# EAGLE board TREM_STM_OLD (EAGLE 9.2.2)
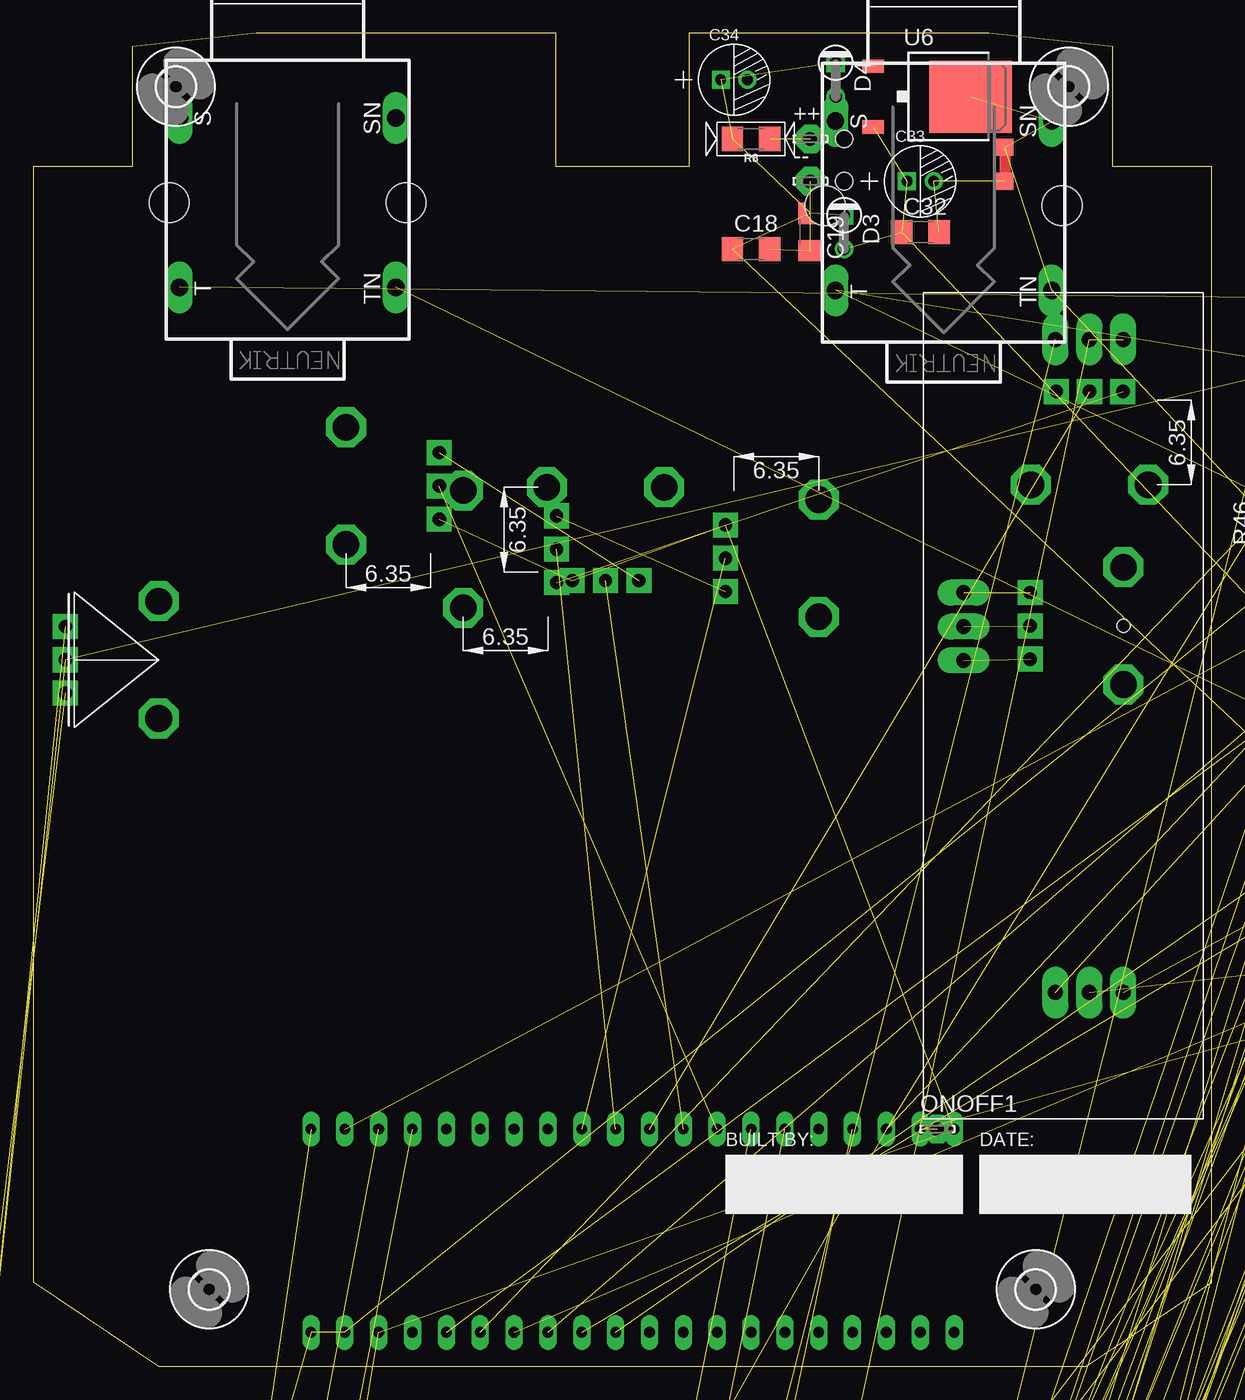
[diagram p0: board, top side]
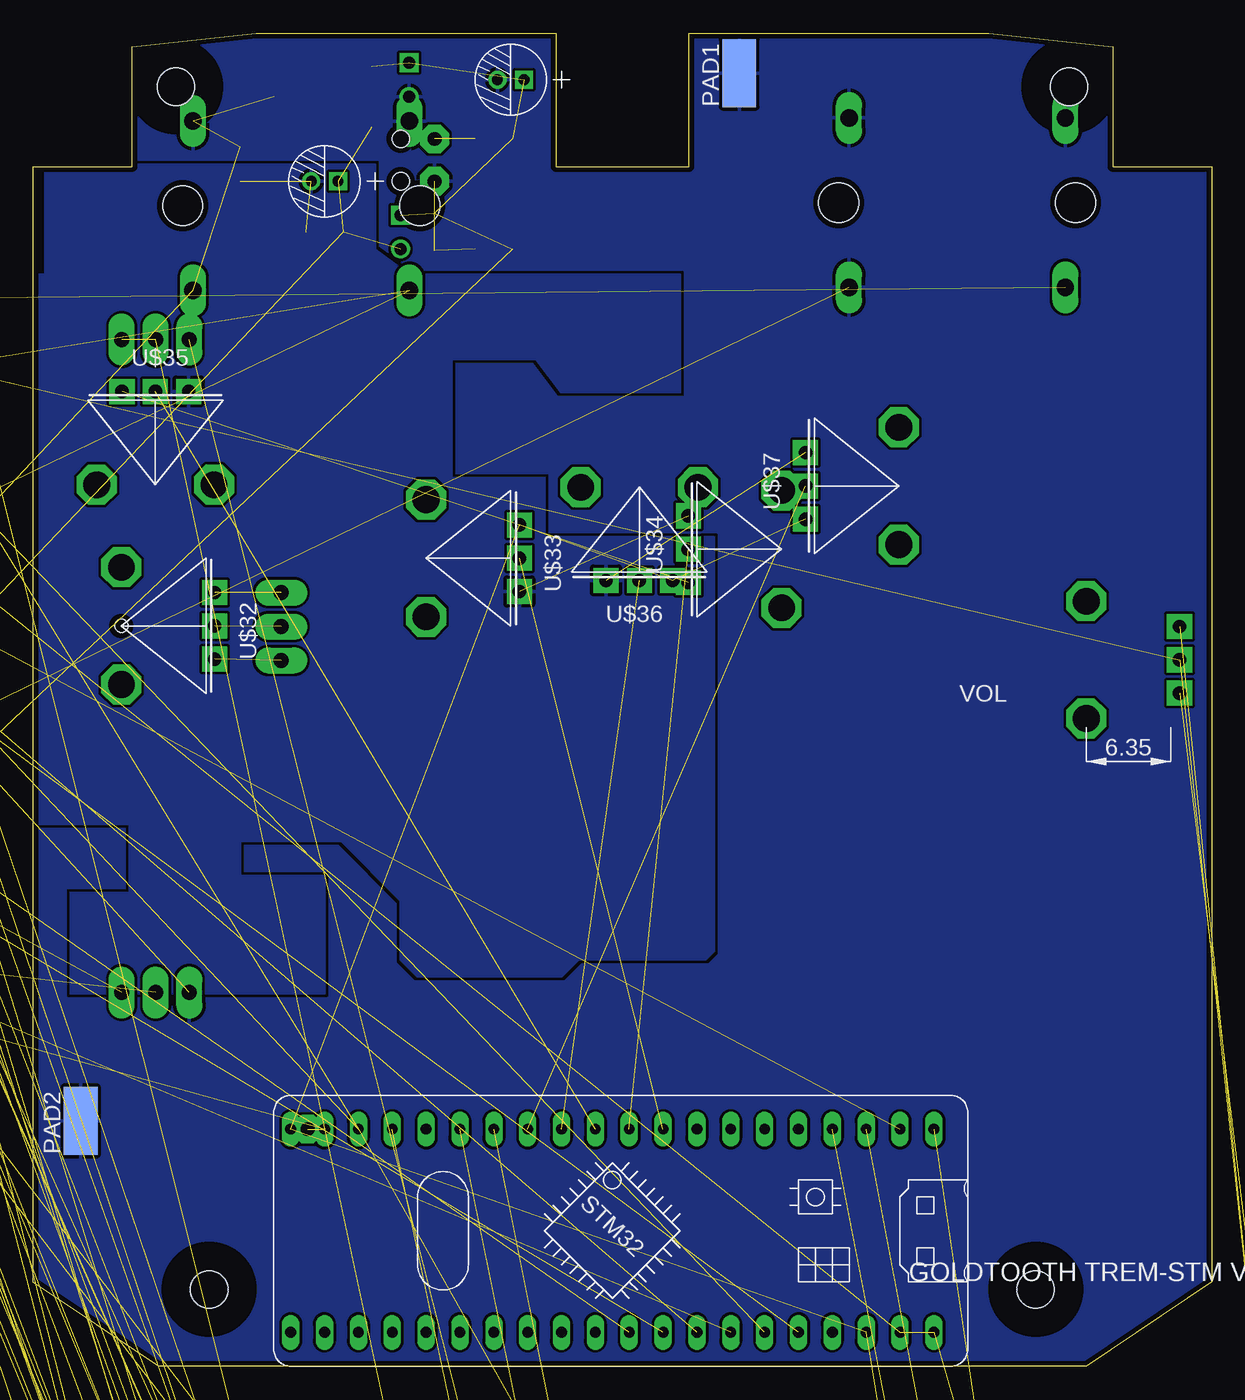
[diagram p1: board, bottom side, seen from below]

Size 88.4 x 100 mm. Coordinates in mm from the lower left corner, seen from the top.
Outline: 0,6.35 9.4,0 79,0 88.4,6.3 88.4,90 81,90 81,99 71.7,100 49.2,100 49.2,90 39.2,90 39.2,100 16.7,100 7.4,99 7.4,90 0,90 0,6.35
Copper layers (1*16): Top 0.035mm / dielectric 1.5mm / Bottom 0.035mm
Design rules "GT": minimum track width 8mil, minimum drill 0.3mm, track to track 8mil, track to pad 6mil, pad to pad 6mil, via to via 6mil, smd to smd 0mil, copper to edge 0.4mm, drill to drill 10mil, minimum pad ring 10mil, minimum via ring 6mil, stop-mask expansion 2mil, vias tented up to drill 25mil, thermal gap 10mil
bRestrict: 1 lines

## Footprints (pad centres in the part's own frame; a part is rotated, then mirrored left to right if it is on the bottom)
LSP10 = drill 1.016 pad 2.159 octagon: MP 0,0
PC-D5.3MM = drill 0.8 pad 1.35 square: + -1,0 | drill 0.8 pad 1.35: - 1,0
C1206 = smd 1.6 x 1.8: 1 -1.4,0; 2 1.4,0
CERAMIC-5MM = drill 0.635 pad 1.143: 1 -2.5,0; 2 2.5,0
DO41-1 = drill 0.9: A 1.27,0 | drill 0.9 square: C -1.27,0
SMB = smd 2.4 x 2.4: A 2.2,0; C -2.2,0
DIODE-1N4148 = drill 0.9 pad 1.88: A -3.81,0; C 3.81,0
SO-16 = smd 0.66 x 2.032: 1 -4.445,-3.073; 2 -3.175,-3.073; 3 -1.905,-3.073; 4 -0.635,-3.073; 5 0.635,-3.073; 6 1.905,-3.073; 7 3.175,-3.073; 8 4.445,-3.073; 9 4.445,3.073; 10 3.175,3.073; 11 1.905,3.073; 12 0.635,3.073; 13 -0.635,3.073; 14 -1.905,3.073; 15 -3.175,3.073; 16 -4.445,3.073
2,8 = hole 2.8: 0,0
SO08 = smd 0.6 x 2.2: 1 -1.905,-2.6; 2 -0.635,-2.6; 3 0.635,-2.6; 4 1.905,-2.6; 5 1.905,2.6; 6 0.635,2.6; 7 -0.635,2.6; 8 -1.905,2.6
SO14 = smd 0.6 x 2.2: 1 -3.81,-2.6; 2 -2.54,-2.6; 3 -1.27,-2.6; 4 0,-2.6; 5 1.27,-2.6; 6 2.54,-2.6; 7 3.81,-2.6; 8 3.81,2.6; 9 2.54,2.6; 10 1.27,2.6; 11 0,2.6; 12 -1.27,2.6; 13 -2.54,2.6; 14 -3.81,2.6
MONO = drill 1.3 long: S 6.35,8.115; SN 6.35,-8.115; T -6.35,8.115; TN -6.35,-8.115 | hole 3: 0,8.89; 0,-8.89
FTR-B4G = smd 0.8 x 3.1: 1 -3.8,-2.65; 2 -0.6,-2.65; 3 1.6,-2.65; 4 3.8,-2.65; 5 3.8,2.65; 6 1.6,2.65; 7 -0.6,2.65; 8 -3.8,2.65
SMD4 = smd 1.27 x 2.54: 1 -1.27,-3.5; 2 1.27,-3.5; 3 1.27,3.5; 4 -1.27,3.5
SMD2,54-5,08 = smd 2.54 x 5.08: 1 0,0
TO92 = drill 0.813 octagon: 1 1.27,0; 2 0,1.905; 3 -1.27,0
M1206 = smd 1.6 x 2: 1 -1.4,0; 2 1.4,0
1206 = smd 1.6 x 1.8: 1 -1.4,0; 2 1.4,0
SOP50P490X110-10N = smd 1.524 x 0.33: 1 -2.032,0.991; 2 -2.032,0.508; 3 -2.032,0; 4 -2.032,-0.508; 5 -2.032,-0.991; 6 2.032,-0.991; 7 2.032,-0.508; 8 2.032,0; 9 2.032,0.508; 10 2.032,0.991
TO-252 = smd 1 x 1.6: 1 -2.28,-4.8; 2 2.28,-4.8 | smd 5.4 x 6.2: 3 0,2.5
HOLD = hole 1.3: 0,0
TO92- = drill 0.7 octagon: 1 2.54,0; 2 0,0; 3 -2.54,0
BLUE_PILL = drill 0.8 long: P$1 -7.62,15.24; P$2 -7.62,12.7; P$3 -7.62,10.16; P$4 -7.62,7.62; P$5 -7.62,5.08; P$6 -7.62,2.54; P$7 -7.62,0; P$8 -7.62,-2.54; P$9 -7.62,-5.08; P$10 -7.62,-7.62; P$11 -7.62,-10.16; P$12 -7.62,-12.7; P$13 -7.62,-15.24; P$14 -7.62,-17.78; P$15 -7.62,-20.32; P$16 -7.62,-22.86; P$17 -7.62,-25.4; P$18 -7.62,-27.94; P$19 -7.62,-30.48; P$20 -7.62,-33.02; P$21 7.62,15.24; P$22 7.62,12.7; P$23 7.62,10.16; P$24 7.62,7.62; P$25 7.62,5.08; P$26 7.62,2.54; P$27 7.62,0; P$28 7.62,-2.54; P$29 7.62,-5.08; P$30 7.62,-7.62; P$31 7.62,-10.16; P$32 7.62,-12.7; P$33 7.62,-15.24; P$34 7.62,-17.78; P$35 7.62,-20.32; P$36 7.62,-22.86; P$37 7.62,-25.4; P$38 7.62,-27.94; P$39 7.62,-30.48; P$40 7.62,-33.02
PLUGIN_RECIEVE = drill 1.118 pad 1.956 long: 18V -27.511,0.017; GND -27.511,5.097; INV 21.489,0.017; MAX -2.591,11.989; MIN 2.489,11.989; NONINV 21.489,2.557; OUT 21.489,5.097; VB -27.511,2.557; WIPER -0.051,11.989 | drill 2 octagon: P$4 4.4,0; P$5 -4.4,0 | drill 1 pad 1.88 square: POTMAX -2.5,7; POTMIN 2.5,7; POTWIPE 0,7 | hole 1: 0,0
ALPS_POT = drill 1 pad 1.88 square: P$1 7,-2.5; P$2 7,0; P$3 7,2.5 | drill 2 octagon: P$4 0,-4.4; P$5 0,4.4
GND-GNDA-1,27MM = smd 1.27 x 1.27: GND -1.27,0; GNDA 1.27,0

## Placement (x,y rotation side)
++  LSP10  [LSP10]  58.3,92.08 0 top
--  LSP10  [LSP10]  58.3,88.9 0 top
C1  4.7uf  [PC-D5.3MM]  -4.3,-171.45 0 top  (outside the outline)
C2  1uf  [PC-D5.3MM]  105.92,48.26 0 top  (outside the outline)
C3  cpl  [C1206]  -19.81,-133.35 0 top  (outside the outline)
C4  1uf  [PC-D5.3MM]  -4.3,-184.15 0 top  (outside the outline)
C5  cpl  [C1206]  -27.43,-139.7 0 top  (outside the outline)
C6  cpl  [C1206]  -27.43,-146.05 0 top  (outside the outline)
C7  1uf  [C1206]  -84.58,-703.58 0 top  (outside the outline)
C9  100pf  [C1206]  -59.18,-411.48 0 top  (outside the outline)
C11  2.2n  [CERAMIC-5MM]  -57.91,-416.56 0 top  (outside the outline)
C12  2.2n  [CERAMIC-5MM]  -66.8,-574.04 0 top  (outside the outline)
C13  4.7uf  [PC-D5.3MM]  -89.66,-636.27 0 top  (outside the outline)
C14  4.7uf  [PC-D5.3MM]  -82.04,-636.27 0 top  (outside the outline)
C15  1nf  [CERAMIC-5MM]  -57.91,-426.72 0 top  (outside the outline)
C16  2.2n  [CERAMIC-5MM]  -57.91,-436.88 0 top  (outside the outline)
C17  1nf  [CERAMIC-5MM]  -57.91,-447.04 0 top  (outside the outline)
C18  cpl  [C1206]  53.85,83.82 0 top
C19  cpl  [C1206]  58.3,85.09 270 top
C20  1nf  [CERAMIC-5MM]  -89.66,-655.32 0 top  (outside the outline)
C32  100n  [C1206]  66.55,85.09 0 top
C33  4.7uf  [PC-D5.3MM]  66.55,88.9 0 top
C34  4.7uf  [PC-D5.3MM]  52.58,96.52 0 top
D1  1N4004  [DO41-1]  105.92,60.96 0 top  (outside the outline)
D2  1n5817  [SMB]  95.76,66.04 0 top  (outside the outline)
D3  1n4001_smd  [DO41-1]  60.84,85.09 270 top
D4  1n4001_smd  [DO41-1]  60.2,96.52 270 top
D10  200mA/100V/1V  [DIODE-1N4148]  -88.39,-645.16 0 top  (outside the outline)
DA1  V2164M  [SO-16]  98.3,34.29 270 top  (outside the outline)
DA2  V2164M  [SO-16]  95.76,13.97 270 top  (outside the outline)
H1  MOUNT-HOLE2.8  [2,8]  10.7,96 0 top
H2  MOUNT-HOLE2.8  [2,8]  77.7,96 0 top
H3  MOUNT-HOLE2.8  [2,8]  13.19,5.76 0 top
H4  MOUNT-HOLE2.8  [2,8]  75.21,5.76 0 top
IC1  TL072D  [SO08]  109.73,36.83 270 top  (outside the outline)
IC2  TL074D  [SO14]  97.03,44.45 0 top  (outside the outline)
IC3  TL074D  [SO14]  95.76,24.13 270 top  (outside the outline)
IN_JACK  MMMONNN  [MONO]  19.08,87.3 90 top
K2  FTR-B4G  [FTR-B4G]  98.3,77.47 180 top  (outside the outline)
OK2  PC817DIL04  [SMD4]  104.65,63.5 180 top  (outside the outline)
ONOFF1  LSP10  [LSP10]  67.82,17.78 0 top
ONOFF2  LSP10  [LSP10]  100.84,26.67 0 top  (outside the outline)
OUT_JACK  MMMONNN  [MONO]  68.3,87.07 90 top
PAD1  [SMD2,54-5,08]  35.44,97 0 bottom
PAD2  [SMD2,54-5,08]  84.84,18.41 0 bottom
Q1  BC547  [TO92]  102.11,27.94 0 top  (outside the outline)
R1  47k  [M1206]  100.84,59.69 0 top  (outside the outline)
R2  47k  [M1206]  97.03,71.12 270 top  (outside the outline)
R3  10k  [M1206]  -90.93,-716.28 0 top  (outside the outline)
R4  10k  [M1206]  -90.93,-722.63 0 top  (outside the outline)
R7  4.7k  [M1206]  -33.78,-257.81 0 top  (outside the outline)
R8  6V/0.75A  [1206]  53.85,92.08 180 top
R9  10k  [M1206]  -33.78,-264.16 0 top  (outside the outline)
R10  2k  [M1206]  -59.18,-379.73 0 top  (outside the outline)
R11  2k  [M1206]  -50.29,-335.28 0 top  (outside the outline)
R12  2k  [M1206]  -59.18,-386.08 0 top  (outside the outline)
R13  4.7k  [M1206]  -41.4,-304.8 0 top  (outside the outline)
R14  200r  [M1206]  96.39,55.24 90 top  (outside the outline)
R15  2k  [M1206]  -59.18,-392.43 0 top  (outside the outline)
R16  10k  [M1206]  -36.32,-304.8 0 top  (outside the outline)
R17  4.7k  [M1206]  -50.29,-341.63 0 top  (outside the outline)
R18  4.7k  [M1206]  -41.4,-328.93 0 top  (outside the outline)
R19  2k  [M1206]  -59.18,-398.78 0 top  (outside the outline)
R20  10k  [M1206]  -36.32,-328.93 0 top  (outside the outline)
R21  2k  [M1206]  -90.93,-660.4 0 top  (outside the outline)
R22  2k  [M1206]  -59.18,-354.33 0 top  (outside the outline)
R23  220r  [M1206]  102.11,41.91 90 top  (outside the outline)
R24  220r  [M1206]  105.28,39.37 90 top  (outside the outline)
R25  220r  [M1206]  102.11,55.88 90 top  (outside the outline)
R26  220r  [M1206]  105.28,30.48 90 top  (outside the outline)
R30  10k  [M1206]  -59.18,-405.13 0 top  (outside the outline)
R31  30k  [M1206]  -59.18,-421.64 0 top  (outside the outline)
R32  470r  [M1206]  -59.18,-431.8 0 top  (outside the outline)
R33  30k  [M1206]  -59.18,-441.96 0 top  (outside the outline)
R34  470r  [M1206]  -59.18,-452.12 0 top  (outside the outline)
R35  30k  [M1206]  -59.18,-458.47 0 top  (outside the outline)
R36  30k  [M1206]  -59.18,-464.82 0 top  (outside the outline)
R37  10k  [M1206]  -59.18,-471.17 0 top  (outside the outline)
R38  1k  [M1206]  96.39,50.8 90 top  (outside the outline)
R39  47k  [M1206]  -59.18,-477.52 0 top  (outside the outline)
R40  10k  [M1206]  -59.18,-483.87 0 top  (outside the outline)
R41  10k??  [M1206]  104.02,48.9 270 top  (outside the outline)
R42  2k  [M1206]  -59.18,-490.22 0 top  (outside the outline)
R43  1m  [M1206]  -59.18,-496.57 0 top  (outside the outline)
R44  1m  [M1206]  -59.18,-502.92 0 top  (outside the outline)
R45  1k?  [M1206]  98.94,51.44 90 top  (outside the outline)
R46  1k  [M1206]  92.59,62.87 90 top  (outside the outline)
R47  30k  [M1206]  -59.18,-509.27 0 top  (outside the outline)
R48  200r  [M1206]  -59.18,-515.62 0 top  (outside the outline)
R49  1m  [M1206]  -68.07,-579.12 0 top  (outside the outline)
R50  1m  [M1206]  -68.07,-585.47 0 top  (outside the outline)
R51  100k  [M1206]  -68.07,-619.76 0 top  (outside the outline)
R52  2k  [M1206]  -75.69,-626.11 0 top  (outside the outline)
R53  2k  [M1206]  -75.69,-632.46 0 top  (outside the outline)
R54  2k  [M1206]  -75.69,-638.81 0 top  (outside the outline)
R55  10k  [M1206]  -90.93,-650.24 0 top  (outside the outline)
R56  10k  [M1206]  -90.93,-666.75 0 top  (outside the outline)
R57  2k  [M1206]  -90.93,-673.1 0 top  (outside the outline)
R58  2k  [M1206]  -90.93,-679.45 0 top  (outside the outline)
R59  2k  [M1206]  -90.93,-685.8 0 top  (outside the outline)
R60  10k  [M1206]  -79.5,-703.58 0 top  (outside the outline)
R61  10k  [M1206]  -90.93,-709.93 0 top  (outside the outline)
R62  100k  [M1206]  -90.93,-703.58 0 top  (outside the outline)
U1  MCP4728-E/UN  [SOP50P490X110-10N]  -87.12,-694.69 0 top  (outside the outline)
U6  18vin / +5vout (DPAK) MC7805  [TO-252]  67.82,95.25 270 top
U$2  [HOLD]  60.84,88.9 0 top
U$3  [HOLD]  60.84,92.08 0 top
U$5  [HOLD]  103.38,38.1 0 top  (outside the outline)
U$8  J111  [TO92-]  -26.16,-243.84 0 top  (outside the outline)
U$9  [HOLD]  99.57,46.99 0 top  (outside the outline)
U$10  J111  [TO92-]  -26.16,-250.19 0 top  (outside the outline)
U$11  [BLUE_PILL]  36.07,10.16 270 bottom
U$32  GT_PLUGIN  [PLUGIN_RECIEVE]  81.79,55.54 90 top
U$33  [ALPS_POT]  58.93,60.62 180 top
U$34  [ALPS_POT]  32.26,61.3 0 top
U$35  [ALPS_POT]  79.25,66.13 90 top
U$36  [ALPS_POT]  42.93,65.95 270 top
U$37  [ALPS_POT]  23.46,66.04 0 top
VOL  [ALPS_POT]  9.4,53 0 bottom
~NUDEV~1  GND-GNDA1,27MM  [GND-GNDA-1,27MM]  72.9,90.17 270 top

## Library data of the parts
++ -- ONOFF1 ONOFF2 = solpad
C1 C2 C4 C13 C14 C33 C34 = GT_Capacitor; PACKAGE: TH
C3 C5-C7 C9 C18 C19 C32 R1-R4 R7 R9-R26 R30-R62 = resistor
C11 C12 C15-C17 C20 = GT_Capacitor; PACKAGE: 5MM TH
D1 D3 D4 = gm-diodes
D2 = diode
D10 = SparkFun-DiscreteSemi; PROD_ID: DIO-08378
DA1 DA2 = ic-coolaudio
H1-H4 = holes
IC1-IC3 = linear
IN_JACK OUT_JACK = gm-jacks2
K2 = relay
OK2 = GT_optocoupler
PAD1 PAD2 = wirepad
Q1 = transistor-npn
R8 = GOLDTOOTH-Fuses; PROD_ID: RES-11150
U1 = GD_MCP4728; MPN: MCP4728-E/UN; OC_FARNELL: 1800217; OC_NEWARK: 08R1808; PACKAGE: MSOP-10; SUPPLIER: MICROCHIP
U6 = SparkFun-IC-Power; PROD_ID: VREG-12370
U$2 U$3 U$5 U$9 = fv-1consolidated
U$8 U$10 = fv1_bingo
U$11 U$32 = BluePill
U$33-U$37 VOL = SparkFun-Electromechanical_1
~NUDEV~1 = ground-junctions

## Nets
1SD: D2.A K2.8 Q1.3
+3V3: C7.2 R60.1 R61.1 R62.1 U1.1 U$11.P$20 U$11.P$23 U$33.P$1 U$34.P$1 U$35.P$1 U$36.P$1 U$37.P$1
+5V: C1.+ C3.1 C32.1 C33.+ D2.C D3.A K2.1 R38.2 U6.2 U$11.P$18
+18V: C18.1 C19.1 C34.+ D1.C D3.C D4.C DA1.16 DA2.16 IC1.8 IC2.4 IC3.4 R1.1 R8.2 R10.1 R11.2 R22.1 R52.1 R53.1 R54.1 U6.1 U$32.18V
BP: C11.2 DA1.7 IC2.8 R31.2 R39.2 R43.2 U$8.2 U$10.2
BTN_ONOFF: ONOFF2.MP R48.1
BTN_WAVE: R14.1
CIRCUIT_IN: C12.1 K2.4 R50.1
CIRCUIT_OUT: K2.5 R51.1 VOL.P$2
DAC_A: R58.1 U1.6
DAC_B: R57.1 U1.7
DAC_C: R59.1 U1.8
DAC_D: R21.2 U1.9
GND1: --.MP C2.- C4.- C5.2 C6.2 C7.1 C18.2 C19.2 C20.1 C34.- D1.A D4.A DA1.9 DA2.9 IC1.4 IC2.11 IC3.11 IN_JACK.S IN_JACK.SN IN_JACK.TN OK2.4 OUT_JACK.S OUT_JACK.SN OUT_JACK.TN PAD1.1 PAD2.1 R2.1 R50.2 R55.1 U1.10 U6.3 U$32.GND ~NUDEV~1.GND
GND2: C1.- C3.2 C32.2 C33.- OK2.2 ONOFF1.MP Q1.1 R41.1 U$11.P$19 U$11.P$21 U$11.P$22 U$33.P$3 U$34.P$3 U$35.P$3 U$36.P$3 U$37.P$3 ~NUDEV~1.GNDA
HP: DA1.2 IC2.1 R33.2 R35.2
IN: IN_JACK.T K2.3
INDICATOR1: R38.1
LDAC_DISABLE: U1.4 U$11.P$17
LP: C16.2 DA1.10 IC2.7 R47.2
LP_RETURN: IC2.2 R35.1 R36.2 R47.1
MOSFET: R45.2 U$11.P$25
N$1: IC3.2 R7.2 R9.1
N$2: C2.+ IC1.3 R1.2 R2.2
N$3: DA1.1 R22.2
N$4: IC3.3 R53.2 R58.2
N$5: IC3.5 R52.2 R57.2
N$6: IC3.6 R13.2 R16.1
N$7: DA2.1 R10.2
N$8: IC3.12 R54.2 R59.2
N$9: IC3.10 R11.1 R21.1
N$10: IC3.13 R18.2 R20.1
N$11: DA1.4 R12.1
N$12: R62.2 U1.5
N$13: IC3.9 R17.2 R56.1
N$14: DA1.5 R15.1
N$15: DA1.12 R19.1
N$16: IC1.6 IC1.7 R3.2 R4.2
N$17: R23.1
N$18: R24.1
N$19: R25.1
N$20: IC2.12 R12.2 R15.2 R19.2
N$21: C9.1 IC2.13 R30.2
N$22: R26.1
N$23: R36.1 U$32.OUT
N$24: C11.1 DA1.13 IC2.9
N$25: R40.2 U$10.3
N$26: C15.2 DA2.15 R31.1
N$27: C15.1 R32.1
N$28: C16.1 DA2.13 IC2.6
N$29: R42.2 U$8.3
N$30: C17.2 DA1.15 R33.1
N$32: R4.1 U$32.INV U$32.NONINV
N$33: U$32.MIN U$32.POTMIN
N$34: U$32.POTWIPE U$32.WIPER
N$35: U$32.MAX U$32.POTMAX
N$37: K2.2 K2.7
N$41: ++.MP R8.1
N$42: C17.1 R34.1
N$43: C12.2 IC1.5 R49.1
N$44: C13.- D10.A
N$45: R51.2 VOL.P$3
N$46: C13.+ R3.1
N$47: R48.2 U$11.P$1
N$48: R14.2 U$11.P$2
N$50: R26.2 U$11.P$27
N$51: R25.2 U$11.P$28
N$52: R24.2 U$11.P$29
N$53: R23.2 U$11.P$30
N$84: Q1.2 R41.2 R45.1
N$88: OK2.1 R46.1
OUT: K2.6 OK2.3 OUT_JACK.T
OUT_A: DA1.3 IC3.1 R7.1
OUT_B: DA1.6 IC3.7 R13.1
OUT_C: DA1.11 IC3.14 R18.1
OUT_D_FREQ: DA1.14 DA2.14 IC3.8 R17.1
PHOTO_TRANS: R46.2 U$11.P$26
POT1: U$11.P$9 U$33.P$2
POT2: U$11.P$10 U$34.P$2
POT3: U$11.P$11 U$35.P$2
POT4: U$11.P$12 U$36.P$2
POT5: U$11.P$13 U$37.P$2
Q_1: U$8.1 U$11.P$3
Q_2: U$10.1 U$11.P$4
READ: C14.- VOL.P$1
RES: IC2.3 R37.2 R39.1 R40.1 R42.1 R44.2
SCL_3.3V: R61.2 U1.2 U$11.P$14
SDA_3.3V: R60.2 U1.3 U$11.P$15
STM_READ_AUDIO: C20.2 D10.C R55.2
SUM_OUT: C9.2 C14.+ IC2.14 R30.1
VB: C4.+ C5.1 C6.1 DA1.8 DA2.8 IC1.1 IC1.2 IC2.5 IC2.10 R9.2 R16.2 R20.2 R32.2 R34.2 R37.1 R43.1 R44.1 R49.2 R56.2 U$32.VB

## Tracks (layer width: path | path; a pad name or v marks a point on that pad's centre or on a via)
1SD  (2 unrouted)
+3V3  (11 unrouted)
+5V  (9 unrouted)
+18V  (20 unrouted)
BP  (7 unrouted)
BTN_ONOFF  (1 unrouted)
CIRCUIT_IN  (2 unrouted)
CIRCUIT_OUT  (2 unrouted)
DAC_A  (1 unrouted)
DAC_B  (1 unrouted)
DAC_C  (1 unrouted)
DAC_D  (1 unrouted)
GND1  (21 unrouted)
  pour Bottom (rank 2): -0.76,100.33 -0.76,-0.64 93.22,-0.64 93.22,100.33
GND2  (12 unrouted)
  pour Bottom: 65.28,39.37 72.9,39.37 72.9,36.83 66.55,36.83 66.55,27.94 85.6,27.94 85.6,35.56 81.16,35.56 81.16,40.64 88.14,40.64 88.14,81.92 87.51,81.92 87.51,90.17 62.74,90.17 62.74,83.82 60.2,81.92 39.88,81.92 39.88,73.03 48.77,73.03 50.63,75.52 57.03,75.52 57.03,66.67 50.04,66.67 50.04,62.23 37.34,62.23 37.34,31.11 37.98,30.48 47.5,30.48 48.77,29.21 59.57,29.21 60.84,30.48 60.84,34.92
HP  (3 unrouted)
IN  (1 unrouted)
LDAC_DISABLE  (1 unrouted)
LP  (3 unrouted)
LP_RETURN  (3 unrouted)
MOSFET  (1 unrouted)
N$1  (2 unrouted)
N$2  (3 unrouted)
N$3  (1 unrouted)
N$4  (2 unrouted)
N$5  (2 unrouted)
N$6  (2 unrouted)
N$7  (1 unrouted)
N$8  (2 unrouted)
N$9  (2 unrouted)
N$10  (2 unrouted)
N$11  (1 unrouted)
N$12  (1 unrouted)
N$13  (2 unrouted)
N$14  (1 unrouted)
N$15  (1 unrouted)
N$16  (3 unrouted)
N$20  (3 unrouted)
N$21  (2 unrouted)
N$23  (1 unrouted)
N$24  (2 unrouted)
N$25  (1 unrouted)
N$26  (2 unrouted)
N$27  (1 unrouted)
N$28  (2 unrouted)
N$29  (1 unrouted)
N$30  (2 unrouted)
N$32  (2 unrouted)
N$33  (1 unrouted)
N$34  (1 unrouted)
N$35  (1 unrouted)
N$37  (1 unrouted)
N$41  (1 unrouted)
N$42  (1 unrouted)
N$43  (2 unrouted)
N$44  (1 unrouted)
N$45  (1 unrouted)
N$46  (1 unrouted)
N$47  (1 unrouted)
N$48  (1 unrouted)
N$50  (1 unrouted)
N$51  (1 unrouted)
N$52  (1 unrouted)
N$53  (1 unrouted)
N$84  (2 unrouted)
N$88  (1 unrouted)
OUT  (2 unrouted)
OUT_A  (2 unrouted)
OUT_B  (2 unrouted)
OUT_C  (2 unrouted)
OUT_D_FREQ  (3 unrouted)
PHOTO_TRANS  (1 unrouted)
POT1  (1 unrouted)
POT2  (1 unrouted)
POT3  (1 unrouted)
POT4  (1 unrouted)
POT5  (1 unrouted)
Q_1  (1 unrouted)
Q_2  (1 unrouted)
READ  (1 unrouted)
RES  (5 unrouted)
SCL_3.3V  (2 unrouted)
SDA_3.3V  (2 unrouted)
STM_READ_AUDIO  (2 unrouted)
SUM_OUT  (3 unrouted)
VB  (19 unrouted)

## Text on the board
tPlace: BUILT BY: | DATE:
bPlace: GOLDTOOTH TREM-STM V1